# Altium PCB Flex_Bridge_SW.PcbDoc (part 2 of 2)
Units mm, origin at the board's own origin, x right, y up, seen from the top; angles counter-clockwise.
Board outline 84.91 x 39.78 mm, 2 copper layers (Top Layer, Bottom Layer); 3 components, 13 nets, 66 pads, 52 vias.
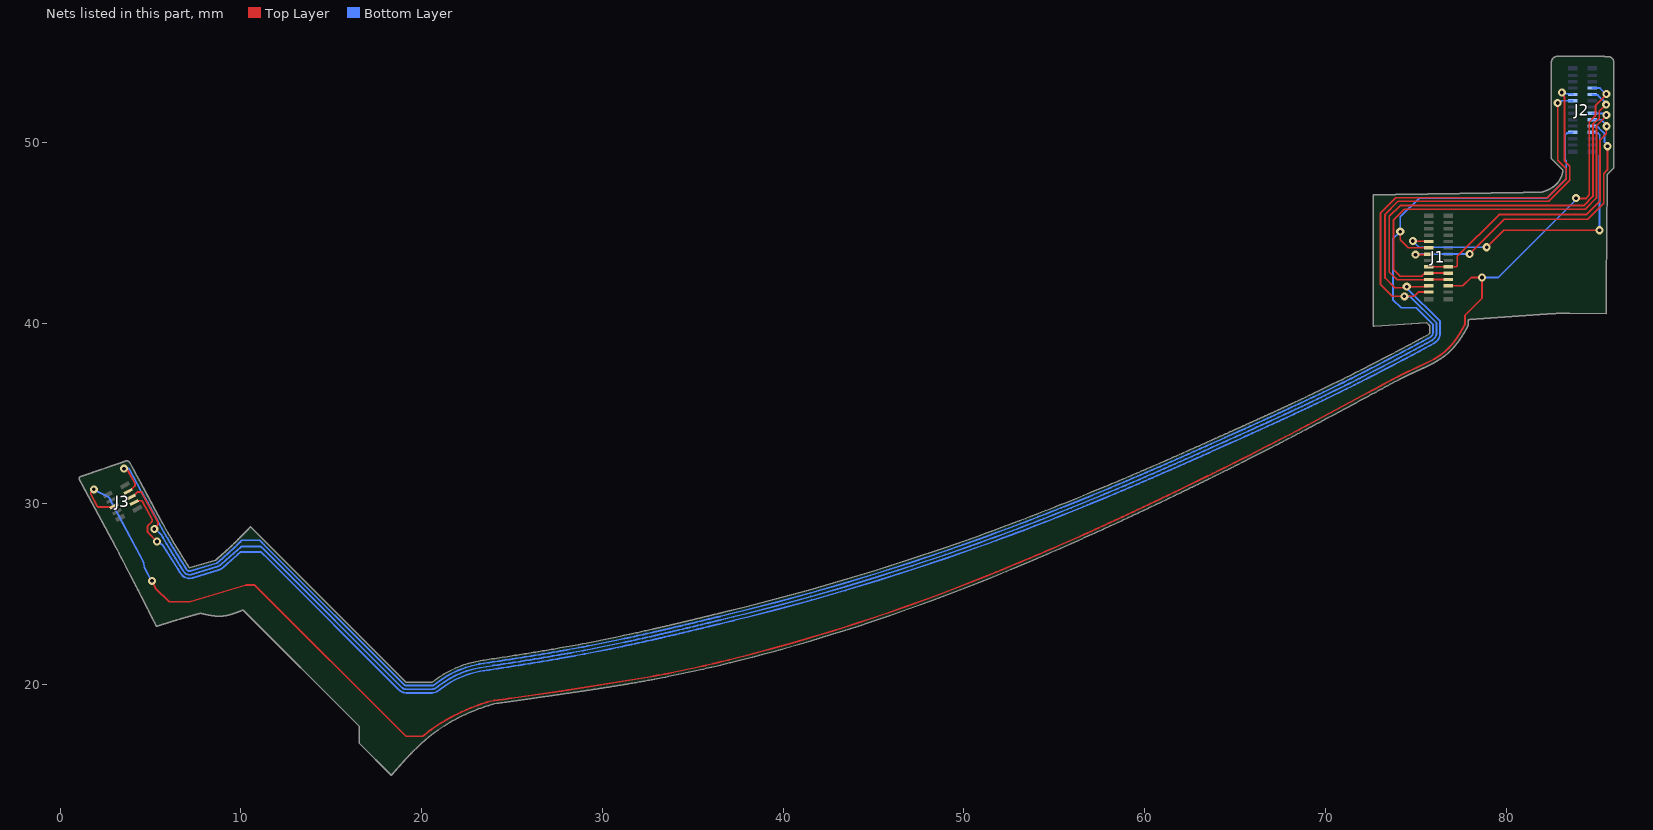
[diagram p2: the nets of this part, all layers, seen from the top]

## Via types
v1: diameter 0.45, hole 0.2, Top Layer to Bottom Layer, 52 vias

## Nets (pads, with @x,y where several pads share a name; then routed paths per layer and width w, separated by ;. In a path a pad name is that pad's centre, name@x,y a point inside that pad or via, vN(x,y) a via of type N, cw(c..) or ccw(c..) an arc to the next point about the centre after c; other vN are vias at no path point) (continued)
I2C3_SCL_3V3: J1.2 J2.10 J3.6 | length 109.2
  Top Layer w0.1: J3.6@3.931,30.378 4.004,30.378 4.283,30.658 4.496,30.658 5.41,29.008 5.41,28.839 5.213,28.643 v1(5.213,28.605) ; J1.2@75.711,41.712 75.137,41.712 74.903,41.478 73.696,41.478 73.05,42.124 73.05,46.101 73.886,46.937 82.279,46.937 83.319,47.977 83.319,48.531 83.29,48.56 82.849,49.001 v1(82.849,52.172)
  Bottom Layer w0.1: v1(5.213,28.605) 5.276,28.605 5.59,28.291 5.606,28.27 5.643,28.205 ccw(c5.817,28.305) 5.644,28.204 5.692,28.122 ccw(c5.865,28.222) 5.692,28.121 5.727,28.061 ; 5.728,28.06 5.76,28.004 5.79,27.954 5.817,27.909 5.84,27.869 5.864,27.828 5.885,27.793 ; 5.885,27.793 5.906,27.759 5.927,27.724 ; 5.927,27.723 5.948,27.688 5.987,27.622 6.005,27.592 6.042,27.532 6.079,27.471 ; 6.079,27.47 6.097,27.44 6.116,27.409 ; 6.116,27.409 6.132,27.384 6.147,27.359 6.162,27.333 6.178,27.308 6.193,27.283 ; 6.193,27.282 6.209,27.257 6.255,27.182 6.272,27.153 6.288,27.127 6.305,27.101 6.337,27.048 6.354,27.021 6.37,26.994 6.387,26.967 6.404,26.94 ; 6.404,26.94 6.421,26.913 6.438,26.885 6.472,26.83 6.49,26.802 6.525,26.746 6.551,26.703 6.565,26.682 ; 6.565,26.682 6.592,26.639 6.606,26.617 6.633,26.573 6.661,26.529 6.678,26.503 6.689,26.485 6.702,26.463 ; 6.703,26.463 6.717,26.44 6.745,26.395 6.774,26.35 6.803,26.304 6.837,26.25 ccw(c7.154,26.451) 7.262,26.092 8.71,26.525 ccw(c8.603,26.884) 8.849,26.602 8.865,26.616 ; 8.866,26.616 8.939,26.68 9,26.734 ; 9.001,26.734 9.069,26.794 ; 9.069,26.794 9.103,26.823 ; 9.103,26.824 9.149,26.864 ; 9.15,26.865 9.153,26.868 ; 9.154,26.868 9.198,26.908 ; 9.199,26.908 9.234,26.939 9.256,26.959 ccw(c9.007,27.239) 9.257,26.96 9.29,26.989 9.34,27.033 ; 9.34,27.034 9.36,27.051 9.404,27.09 9.987,27.61 cw(c10.053,27.535) 10.053,27.635 11.061,27.635 cw(c11.061,27.535) 11.132,27.606 11.207,27.531 11.592,27.146 18.886,19.852 ccw(c19.152,20.117) 19.152,19.742 20.572,19.742 ccw(c20.574,20.117) 20.807,19.823 20.9,19.897 cw(c24.218,15.603) 23.192,20.931 cw(c23.228,20.734) 23.198,20.932 23.22,20.936 23.576,20.991 23.938,21.047 cw(c23.969,20.849) 23.94,21.047 24.084,21.068 24.227,21.09 ; 24.227,21.09 24.369,21.111 24.51,21.133 ; 24.51,21.133 24.649,21.154 24.788,21.176 ; 24.789,21.176 24.925,21.197 ; 24.926,21.197 25.062,21.218 25.197,21.239 ccw(c25.166,21.437) 25.199,21.24 25.342,21.262 25.465,21.282 25.598,21.303 25.729,21.324 25.86,21.345 ; 25.861,21.345 25.989,21.366 26.118,21.387 ; 26.118,21.387 26.246,21.408 26.373,21.429 26.499,21.45 ; 26.5,21.45 26.624,21.471 ccw(c26.591,21.668) 26.625,21.471 26.748,21.492 26.871,21.513 26.994,21.534 27.115,21.555 27.236,21.575 ; 27.237,21.576 27.357,21.596 27.476,21.617 ; 27.477,21.617 27.595,21.638 ; 27.596,21.638 27.713,21.659 27.888,21.69 ; 27.889,21.69 28.062,21.721 28.234,21.752 ; 28.235,21.753 28.405,21.784 ; 28.406,21.784 28.574,21.815 ; 28.575,21.815 28.742,21.846 28.964,21.888 ; 28.964,21.888 29.183,21.929 29.454,21.982 ccw(c29.383,22.35) 29.456,21.982 30.403,22.17 ccw(c30.33,22.538) 30.406,22.171 30.815,22.255 ccw(c30.775,22.451) 30.816,22.255 31.07,22.308 ; 31.07,22.309 31.273,22.351 31.422,22.383 ; 31.423,22.383 31.573,22.416 ccw(c31.53,22.611) 31.574,22.416 31.722,22.448 31.822,22.47 ; 31.822,22.47 31.921,22.491 ; 31.921,22.491 32.02,22.513 ; 32.021,22.513 32.119,22.535 ; 32.119,22.535 32.217,22.557 32.316,22.578 ; 32.316,22.579 32.414,22.6 32.512,22.622 ; 32.513,22.623 32.611,22.644 32.709,22.667 32.809,22.689 32.904,22.711 32.953,22.722 ; 32.954,22.722 33.002,22.733 33.051,22.744 ; 33.052,22.745 33.1,22.756 33.148,22.767 33.247,22.789 ; 33.247,22.789 33.295,22.801 33.344,22.812 33.393,22.823 33.491,22.846 33.588,22.868 ; 33.589,22.869 33.637,22.88 ; 33.637,22.88 33.686,22.891 ; 33.686,22.891 33.735,22.903 33.784,22.914 ; 33.784,22.914 33.833,22.926 33.881,22.937 ccw(c33.836,23.132) 33.883,22.937 33.98,22.96 34.078,22.983 34.225,23.018 34.274,23.03 ; 34.274,23.03 34.421,23.064 ; 34.422,23.065 34.471,23.076 34.52,23.088 ; 34.521,23.088 34.669,23.123 34.718,23.135 34.767,23.147 34.816,23.159 34.966,23.195 35.066,23.219 35.166,23.243 35.215,23.255 35.266,23.267 ; 35.267,23.267 35.417,23.303 35.517,23.328 ; 35.518,23.328 35.572,23.341 35.822,23.401 ; 35.822,23.402 35.873,23.414 35.924,23.426 ; 35.925,23.426 35.975,23.439 36.078,23.464 36.285,23.514 36.336,23.527 ; 36.337,23.527 36.389,23.539 ; 36.389,23.539 36.441,23.552 36.545,23.578 36.598,23.59 ; 36.599,23.591 36.703,23.616 37.237,23.746 ; 37.238,23.747 37.939,23.92 ccw(c37.892,24.114) 37.943,23.921 39.617,24.35 ccw(c5.07,155.292) 50.836,27.838 51.313,28.01 ccw(c51.245,28.198) 51.314,28.01 51.737,28.165 ; 51.739,28.165 52.161,28.321 ccw(c52.091,28.509) 52.162,28.321 52.53,28.458 ; 52.531,28.459 52.898,28.597 ccw(c52.767,28.948) 52.9,28.597 53.214,28.716 53.528,28.836 ; 53.529,28.836 53.843,28.957 54.156,29.078 ; 54.157,29.078 54.417,29.179 ; 54.418,29.18 54.678,29.281 ; 54.678,29.282 54.938,29.384 ; 54.939,29.384 55.198,29.487 ; 55.199,29.487 55.458,29.59 ccw(c55.384,29.776) 55.459,29.59 55.718,29.693 ; 55.718,29.694 55.925,29.777 56.133,29.86 ; 56.134,29.861 56.34,29.944 ; 56.341,29.945 56.547,30.028 ; 56.548,30.029 56.754,30.113 56.961,30.197 ; 56.962,30.198 57.168,30.283 ; 57.169,30.283 57.375,30.368 ; 57.376,30.368 57.581,30.453 ; 57.583,30.454 57.789,30.539 57.996,30.625 58.151,30.69 58.306,30.755 ; 58.307,30.756 58.46,30.82 58.616,30.886 ; 58.617,30.886 58.771,30.951 58.926,31.017 ; 58.926,31.017 59.081,31.083 ; 59.082,31.083 59.236,31.149 59.391,31.214 ; 59.391,31.215 59.546,31.281 59.701,31.347 59.856,31.414 ; 59.857,31.414 60.011,31.481 60.167,31.548 ; 60.167,31.548 60.322,31.615 60.477,31.682 ; 60.478,31.682 60.633,31.75 ; 60.633,31.75 60.787,31.817 ; 60.788,31.817 60.943,31.885 61.098,31.953 ; 61.099,31.953 61.255,32.021 ; 61.255,32.021 61.41,32.089 61.566,32.158 61.669,32.203 61.774,32.249 61.878,32.295 61.982,32.341 ; 61.982,32.341 62.086,32.387 62.189,32.433 ; 62.19,32.433 62.294,32.479 ; 62.294,32.48 62.398,32.526 ; 62.399,32.526 62.502,32.572 ; 62.503,32.572 62.607,32.618 62.71,32.665 ; 62.711,32.665 62.815,32.711 62.92,32.758 63.024,32.805 ; 63.024,32.805 63.129,32.851 ; 63.129,32.852 63.233,32.898 63.337,32.945 ccw(c63.184,33.287) 63.339,32.946 63.442,32.992 ; 63.443,32.992 63.547,33.039 ; 63.548,33.039 63.651,33.086 ccw(c63.57,33.269) 63.653,33.087 64.171,33.32 ; 64.172,33.321 64.324,33.389 64.576,33.503 ; 64.577,33.503 64.676,33.548 65.023,33.704 ; 65.023,33.704 65.12,33.748 65.218,33.792 65.266,33.814 65.46,33.901 65.652,33.988 65.747,34.031 65.842,34.074 ; 65.843,34.074 65.89,34.096 65.937,34.117 ; 65.938,34.117 65.984,34.138 ; 65.985,34.138 66.219,34.245 66.313,34.287 ; 66.314,34.288 66.416,34.334 66.592,34.414 66.685,34.457 66.731,34.478 ccw(c66.648,34.66) 66.732,34.478 66.782,34.501 66.959,34.582 67.007,34.604 ; 67.007,34.604 67.053,34.625 ; 67.054,34.625 67.168,34.677 67.236,34.709 67.282,34.73 67.373,34.772 ; 67.374,34.772 67.465,34.814 67.601,34.877 67.738,34.94 67.783,34.961 67.925,35.026 68.056,35.087 68.101,35.109 ; 68.102,35.109 68.147,35.13 68.192,35.151 ; 68.193,35.151 68.237,35.172 ; 68.238,35.172 68.328,35.214 68.419,35.257 ccw(c68.334,35.438) 68.42,35.258 68.51,35.3 68.6,35.342 ; 68.601,35.342 68.692,35.385 ; 68.693,35.386 68.783,35.428 ccw(c68.698,35.609) 68.784,35.429 68.875,35.471 68.966,35.514 69.057,35.558 69.148,35.601 ccw(c68.987,35.94) 69.149,35.601 69.285,35.666 ; 69.286,35.667 69.423,35.732 ccw(c69.262,36.071) 69.424,35.732 69.562,35.799 ; 69.563,35.799 69.747,35.888 ; 69.748,35.888 69.98,36 ; 69.981,36.001 70.592,36.298 ccw(c70.429,36.636) 70.595,36.3 71.075,36.537 ; 71.076,36.537 71.32,36.659 ; 71.321,36.659 71.518,36.757 ccw(c71.351,37.093) 71.519,36.758 71.717,36.858 ; 71.718,36.858 71.869,36.934 72.021,37.011 72.175,37.089 ; 72.175,37.089 72.333,37.169 72.433,37.221 72.538,37.274 ; 72.539,37.274 72.642,37.328 72.748,37.382 ; 72.749,37.382 72.854,37.437 ccw(c72.683,37.77) 72.856,37.437 72.962,37.492 ; 72.962,37.492 73.069,37.548 73.178,37.604 73.287,37.66 ; 73.287,37.661 73.396,37.717 ; 73.397,37.717 73.507,37.775 ; 73.507,37.775 73.618,37.833 73.73,37.891 ; 73.73,37.891 73.842,37.95 ; 73.842,37.95 73.956,38.009 74.069,38.069 ; 74.07,38.07 74.185,38.13 ; 74.185,38.13 74.3,38.191 ; 74.301,38.192 74.417,38.253 74.534,38.315 ; v1(74.371,41.478) 74.386,41.464 74.687,41.464 76.145,40.006 76.145,39.431 cw(c75.77,39.431) 76.034,39.166 75.972,39.103 cw(c75.706,39.367) 75.884,39.037 75.757,38.969 ; 74.535,38.315 74.652,38.378 ; 74.653,38.378 74.771,38.441 ; 74.772,38.441 74.891,38.505 75.012,38.569 ; 75.013,38.569 75.134,38.634 ; 75.134,38.634 75.256,38.7 75.38,38.766 ; 75.38,38.766 75.505,38.833 75.629,38.9 75.756,38.968 ; v1(82.849,52.172) 82.944,52.172 83.074,52.302 83.6,52.302 83.64,52.262 J2.10@83.68,52.302
I2C3_SDA_1V8: J1.3 J2.5 J3.5 | length 110
  Top Layer w0.1: v1(1.868,30.798) 1.689,30.62 1.689,30.553 2.061,29.866 2.1,29.826 2.659,29.826 2.862,29.855 J3.5@2.978,29.871 ; v1(5.08,25.739) 5.273,25.34 6.029,24.584 7.186,24.584 10.239,25.497 10.268,25.502 10.77,25.502 19.133,17.138 20.059,17.138 20.113,17.182 20.175,17.233 20.237,17.283 20.311,17.341 20.396,17.406 20.505,17.488 cw(c26.017,10.016) 20.672,17.608 cw(c25.979,10.069) 21.332,18.032 21.473,18.113 21.592,18.178 21.699,18.235 21.794,18.285 21.891,18.333 21.975,18.375 22.06,18.416 22.147,18.456 22.219,18.49 22.293,18.523 22.368,18.556 22.443,18.588 22.481,18.604 ; 22.519,18.62 22.481,18.604 ; 23.968,19.106 23.795,19.082 23.787,19.08 23.634,19.032 23.564,19.01 23.495,18.987 23.426,18.965 23.358,18.942 23.291,18.919 23.224,18.895 23.158,18.872 23.092,18.848 23.027,18.824 22.962,18.8 22.898,18.775 22.835,18.75 22.772,18.725 22.71,18.7 22.633,18.669 22.556,18.636 22.481,18.604 ; 23.999,19.111 24.494,19.181 24.675,19.207 ; 24.676,19.207 24.743,19.216 ; 24.743,19.216 24.81,19.226 25.142,19.273 27.747,19.646 27.756,19.647 ccw(c27.689,20.092) 27.758,19.647 28.103,19.702 32.33,20.373 ccw(c32.228,21.015) 32.345,20.376 32.669,20.435 32.854,20.469 32.993,20.495 33.132,20.521 33.271,20.548 33.456,20.584 33.64,20.62 33.919,20.676 35.135,20.932 ; 35.136,20.933 35.372,20.985 35.564,21.028 35.708,21.061 35.853,21.094 35.999,21.128 36.146,21.162 36.294,21.197 36.393,21.221 36.492,21.244 36.591,21.268 36.692,21.292 36.792,21.317 36.893,21.342 36.995,21.366 37.046,21.379 37.454,21.481 37.914,21.597 38.373,21.716 ; 38.374,21.717 38.833,21.838 39.293,21.962 39.803,22.103 40.313,22.246 40.873,22.407 ; 40.875,22.407 41.169,22.494 41.434,22.571 42.045,22.755 42.655,22.941 43.316,23.149 44.024,23.376 ; 44.025,23.376 44.833,23.642 ccw(c44.771,23.832) 44.835,23.643 45.564,23.89 45.74,23.95 ccw(c45.676,24.139) 45.742,23.95 46.793,24.317 ; 46.793,24.317 46.798,24.319 48.14,24.806 ccw(c48.071,24.993) 48.142,24.806 ccw(c48.075,24.995) 48.147,24.808 48.805,25.057 49.678,25.387 ccw(c49.608,25.574) 49.681,25.388 51.1,25.946 51.779,26.22 52.264,26.418 52.697,26.596 53.082,26.757 53.418,26.898 53.674,27.006 53.707,27.02 53.994,27.143 ; 53.996,27.143 54.283,27.266 54.522,27.369 54.762,27.473 55.001,27.577 ; 55.002,27.577 55.241,27.681 55.481,27.787 55.673,27.871 55.865,27.956 56.057,28.041 56.249,28.127 56.441,28.213 56.634,28.299 56.826,28.385 56.973,28.452 57.018,28.472 57.163,28.538 57.239,28.572 57.307,28.603 57.452,28.669 57.597,28.735 57.742,28.802 ; 57.742,28.802 57.887,28.868 58.032,28.935 58.178,29.002 58.323,29.069 58.469,29.136 58.614,29.204 58.76,29.272 58.906,29.34 59.053,29.408 59.199,29.477 59.346,29.545 59.493,29.614 59.64,29.683 ; 59.64,29.684 59.788,29.754 59.934,29.822 60.082,29.892 60.23,29.963 ; 60.231,29.963 60.329,30.01 60.428,30.057 60.527,30.104 ; 60.528,30.104 60.626,30.151 60.725,30.198 60.824,30.246 60.923,30.293 ; 60.924,30.294 61.023,30.341 61.123,30.389 61.222,30.437 61.322,30.485 61.422,30.533 61.522,30.581 ccw(c61.437,30.762) 61.524,30.582 61.622,30.629 61.73,30.681 61.823,30.727 61.901,30.764 62.04,30.832 62.14,30.88 63.491,31.539 63.582,31.584 63.672,31.628 63.761,31.672 63.854,31.718 63.985,31.782 64.122,31.851 64.22,31.899 64.809,32.192 64.939,32.257 65.067,32.321 65.195,32.385 65.322,32.449 65.491,32.534 65.701,32.64 ; 65.702,32.64 66.751,33.175 66.92,33.262 67.047,33.327 67.174,33.393 67.301,33.459 67.429,33.525 67.515,33.57 67.616,33.622 67.686,33.659 67.774,33.705 68.006,33.826 68.429,34.047 68.562,34.117 68.651,34.164 68.741,34.212 68.833,34.26 68.924,34.308 69.015,34.356 69.109,34.406 69.199,34.454 69.363,34.54 69.513,34.62 72.447,36.194 ; 73.832,36.944 73.752,36.901 ccw(c73.835,36.747) 73.751,36.9 73.67,36.856 73.528,36.779 73.245,36.626 72.991,36.488 72.798,36.384 72.683,36.322 72.58,36.266 72.448,36.194 ; 73.833,36.944 73.893,36.976 73.942,37.002 ; 73.943,37.002 73.984,37.024 74.02,37.042 74.055,37.06 ; 74.056,37.06 74.085,37.075 74.114,37.09 74.144,37.105 74.167,37.116 ; 74.167,37.116 74.19,37.128 ; 74.19,37.128 74.236,37.151 74.276,37.17 74.293,37.179 74.326,37.195 74.343,37.203 ; 74.344,37.204 74.36,37.212 74.393,37.228 ; 74.394,37.228 74.41,37.236 ; 74.411,37.236 74.436,37.248 cw(c74.513,37.091) 74.438,37.249 74.449,37.254 74.47,37.265 ; 74.471,37.265 74.493,37.276 74.525,37.291 74.568,37.311 cw(c74.642,37.153) 74.569,37.312 74.589,37.321 74.621,37.336 74.641,37.346 74.668,37.358 74.726,37.385 75.07,37.546 75.889,37.939 ccw(c75.803,38.119) 75.899,37.943 75.992,37.995 ccw(c75.896,38.171) 75.994,37.996 ccw(c75.896,38.171) 75.996,37.998 76.018,38.01 76.019,38.011 76.04,38.022 76.051,38.029 ccw(c75.9,38.288) 76.053,38.03 ccw(c75.9,38.288) 76.054,38.031 ; 76.054,38.031 76.074,38.043 76.076,38.044 76.085,38.049 76.094,38.055 ccw(c75.994,38.228) 76.097,38.056 76.104,38.06 76.108,38.063 76.13,38.076 ; 76.131,38.077 76.133,38.078 76.141,38.083 76.151,38.089 ccw(c75.995,38.345) 76.153,38.09 76.155,38.092 76.163,38.097 76.18,38.107 76.185,38.11 76.198,38.118 76.2,38.119 ccw(c76.092,38.288) 76.201,38.121 76.212,38.128 76.229,38.138 76.245,38.149 76.26,38.158 76.271,38.166 76.284,38.174 76.286,38.176 ; 76.287,38.176 76.3,38.185 ; 76.301,38.186 76.316,38.196 76.318,38.198 ; 76.32,38.199 76.336,38.21 76.353,38.222 ; 76.354,38.223 76.375,38.238 76.379,38.241 76.382,38.243 76.394,38.251 ccw(c76.278,38.414) 76.397,38.253 76.408,38.262 76.416,38.268 76.427,38.275 76.441,38.286 76.46,38.301 76.468,38.306 ; 76.469,38.307 76.493,38.326 76.501,38.332 ccw(c76.317,38.569) 76.503,38.333 76.532,38.357 76.547,38.369 ; 76.548,38.369 ccw(c74.375,41.049) 76.771,38.566 76.802,38.597 ccw(c76.662,38.74) 76.804,38.599 76.832,38.627 ; J1.3@76.791,42.062 77.606,42.062 78.063,42.52 v1(78.664,42.52) 78.664,41.377 77.723,40.435 77.723,39.938 ; 76.828,38.624 76.852,38.65 76.873,38.672 76.893,38.694 76.913,38.717 76.93,38.736 76.947,38.755 76.964,38.775 76.981,38.794 76.997,38.814 77.011,38.83 77.024,38.847 77.038,38.863 77.051,38.88 77.065,38.896 77.078,38.913 77.091,38.93 77.105,38.948 77.118,38.965 77.131,38.982 77.145,39 77.158,39.018 77.171,39.036 77.185,39.054 77.198,39.072 77.208,39.086 77.218,39.1 77.228,39.114 77.238,39.128 77.248,39.143 77.258,39.157 77.268,39.171 77.278,39.186 77.288,39.201 77.298,39.215 77.308,39.23 77.318,39.245 77.328,39.26 77.338,39.275 77.348,39.29 77.358,39.306 77.367,39.321 77.377,39.337 77.387,39.352 77.397,39.368 77.407,39.384 77.417,39.4 77.427,39.416 77.437,39.432 77.447,39.448 77.457,39.465 77.467,39.481 77.477,39.498 77.487,39.515 77.497,39.531 77.507,39.548 77.517,39.565 77.527,39.583 77.537,39.6 77.547,39.617 77.557,39.635 77.567,39.652 77.577,39.67 77.587,39.688 77.597,39.706 77.608,39.724 77.618,39.742 77.628,39.76 77.638,39.779 77.648,39.797 77.658,39.816 77.668,39.835 77.678,39.854 77.688,39.873 77.698,39.892 77.708,39.911 77.718,39.931 77.722,39.937 ; 76.832,38.627 ccw(c76.69,38.768) 76.845,38.641 ; v1(83.863,46.912) 83.887,46.888 84.4,46.888 84.599,47.088 84.599,51.124 84.938,51.462 84.938,52.028 85.16,52.251 85.542,52.632 v1(85.542,52.674) ; 72.447,36.194 ccw(c72.352,36.37) 72.448,36.194
  Bottom Layer w0.1: v1(1.868,30.798) 1.868,30.784 1.892,30.76 2.667,30.372 2.681,30.365 2.703,30.343 4.62,26.754 4.622,26.734 4.648,26.492 5.039,25.759 5.055,25.73 5.064,25.739 v1(5.08,25.739) ; v1(78.664,42.52) 79.565,42.52 83.863,46.818 v1(83.863,46.912) ; J2.5@84.76,53.002 85.192,53.002 85.519,52.674 v1(85.542,52.674)
I2C3_SDA_3V3: J1.4 J2.8 J3.8 | length 109
  Top Layer w0.1: J3.8@4.096,30.069 4.287,30.168 4.51,30.168 4.55,30.128 4.571,30.09 5.1,29.127 5.1,29.034 5.054,28.988 4.851,28.785 4.851,28.774 4.838,28.761 4.838,28.424 5.348,27.915 v1(5.359,27.915) ; J1.4@75.711,42.062 75.671,42.022 75.446,42.022 75.437,42.014 v1(74.497,42.014) 74.435,41.951 73.847,41.951 73.304,42.494 73.304,46.025 74.017,46.737 82.168,46.737 82.169,46.736 82.361,46.736 83.519,47.894 83.519,48.686 83.224,48.98 83.224,52.522 83.083,52.663 v1(83.083,52.756)
  Bottom Layer w0.1: v1(5.359,27.915) 5.647,27.744 5.684,27.707 6.478,26.445 6.492,26.422 6.519,26.378 ; 6.52,26.378 6.533,26.357 ; 6.534,26.356 6.548,26.334 6.576,26.288 ; 6.577,26.288 6.605,26.243 ; 6.605,26.243 6.634,26.197 ; 6.634,26.197 6.669,26.143 ccw(c7.154,26.451) 7.318,25.9 ; 7.319,25.9 8.768,26.334 ccw(c8.603,26.884) 8.981,26.451 8.996,26.465 ccw(c8.619,26.899) 8.998,26.466 9.071,26.53 ; 9.071,26.53 9.089,26.545 9.132,26.583 ; 9.133,26.584 9.201,26.643 ccw(c9.069,26.794) 9.202,26.644 9.218,26.658 9.234,26.673 ccw(c8.855,27.105) 9.235,26.674 9.81,27.179 cw(c9.894,27.126) 9.828,27.2 9.946,27.305 cw(c10.012,27.23) 10.012,27.33 11.1,27.33 cw(c11.082,27.232) 11.152,27.303 11.509,26.946 18.744,19.711 ccw(c19.152,20.117) 19.096,19.545 ccw(c19.152,20.117) 19.152,19.542 20.572,19.542 ccw(c20.574,20.117) 20.931,19.666 21.024,19.74 cw(c24.218,15.603) 23.223,20.733 cw(c24.218,15.603) 23.225,20.734 cw(c24.218,15.603) 23.228,20.734 23.735,20.812 23.969,20.849 ; 23.969,20.849 24.114,20.871 ; 24.115,20.871 24.257,20.892 24.399,20.914 ; 24.399,20.914 24.54,20.935 24.679,20.957 24.818,20.978 ccw(c24.757,21.373) 24.819,20.978 24.955,20.999 25.093,21.021 25.228,21.042 25.364,21.063 25.497,21.084 25.629,21.105 25.761,21.127 ; 25.761,21.127 25.892,21.148 ; 25.893,21.148 26.021,21.169 26.15,21.19 26.278,21.211 ; 26.279,21.211 26.405,21.232 26.531,21.253 ; 26.533,21.253 26.657,21.274 ; 26.658,21.274 26.781,21.295 26.905,21.316 ; 26.906,21.316 27.027,21.337 ; 27.028,21.337 27.149,21.357 27.27,21.378 27.39,21.399 ; 27.392,21.399 27.511,21.42 ; 27.512,21.42 27.63,21.441 27.748,21.462 ; 27.748,21.462 27.923,21.493 28.097,21.524 ; 28.098,21.525 28.269,21.556 ccw(c28.199,21.949) 28.271,21.556 28.441,21.587 ; 28.442,21.587 28.611,21.618 ; 28.612,21.618 28.779,21.649 ; 28.78,21.65 29.001,21.691 ccw(c28.964,21.888) 29.002,21.691 29.22,21.733 ; 29.222,21.733 29.492,21.785 ccw(c29.417,22.178) 29.495,21.786 30.442,21.974 ccw(c30.33,22.538) 30.446,21.975 30.855,22.059 ccw(c30.815,22.255) 30.858,22.06 31.111,22.113 ccw(c31.07,22.308) 31.112,22.113 31.314,22.156 31.464,22.188 ; 31.465,22.188 31.614,22.22 ; 31.615,22.22 31.765,22.252 ccw(c31.722,22.448) 31.766,22.253 31.865,22.274 31.964,22.296 32.063,22.318 ccw(c32.02,22.513) 32.064,22.318 32.162,22.339 ; 32.163,22.34 32.261,22.361 32.359,22.383 32.458,22.405 ; 32.458,22.405 32.556,22.427 ccw(c32.512,22.622) 32.557,22.427 32.654,22.449 ; 32.655,22.449 32.753,22.471 32.856,22.495 32.949,22.516 32.998,22.527 ; 32.999,22.527 33.047,22.538 ; 33.047,22.538 33.096,22.549 ; 33.096,22.55 33.144,22.561 ; 33.145,22.561 33.194,22.572 33.242,22.583 33.34,22.606 ccw(c33.295,22.801) 33.341,22.606 33.438,22.628 33.536,22.651 33.634,22.674 ; 33.634,22.674 33.683,22.685 33.78,22.708 33.878,22.731 ; 33.879,22.731 33.927,22.742 ccw(c33.881,22.937) 33.928,22.742 34.025,22.765 34.075,22.777 34.124,22.788 34.272,22.823 34.419,22.858 34.467,22.87 34.517,22.882 34.567,22.893 ; 34.567,22.894 34.765,22.941 34.814,22.952 ; 34.814,22.953 34.863,22.964 ccw(c34.817,23.159) 34.865,22.965 35.014,23 35.213,23.048 35.262,23.06 ; 35.263,23.06 35.313,23.073 ; 35.314,23.073 35.463,23.109 35.564,23.133 35.615,23.146 ; 35.616,23.146 35.869,23.207 ; 35.87,23.207 35.921,23.22 ; 35.921,23.22 35.971,23.232 ; 35.972,23.232 36.022,23.244 ; 36.023,23.245 36.125,23.269 ; 36.126,23.27 36.332,23.32 ; 36.333,23.32 36.384,23.332 36.488,23.358 ; 36.489,23.358 36.645,23.396 36.751,23.422 37.284,23.552 ccw(c37.189,23.941) 37.286,23.552 37.989,23.726 ccw(c37.892,24.114) 37.991,23.726 39.667,24.157 ccw(c5.07,155.292) 50.905,27.65 51.381,27.822 ccw(c51.313,28.01) 51.383,27.822 51.806,27.977 ccw(c51.737,28.165) 51.808,27.977 ; 51.808,27.978 52.23,28.133 ccw(c52.161,28.321) 52.232,28.134 52.6,28.271 ccw(c52.53,28.458) 52.601,28.272 52.969,28.41 53.283,28.529 ; 53.283,28.529 ccw(c53.214,28.716) 53.286,28.53 53.6,28.649 ; 53.601,28.65 53.914,28.77 ccw(c53.843,28.957) 53.916,28.771 54.23,28.892 54.489,28.993 ccw(c54.345,29.366) 54.491,28.993 54.75,29.095 ccw(c54.605,29.468) 54.752,29.096 55.011,29.198 ccw(c54.938,29.384) 55.013,29.198 55.271,29.3 ccw(c55.199,29.487) 55.273,29.301 55.532,29.404 ccw(c55.458,29.59) 55.534,29.405 55.792,29.508 ; 55.793,29.508 55.999,29.591 ccw(c55.851,29.962) 56.001,29.592 56.208,29.675 ; 56.209,29.675 56.415,29.759 ccw(c56.34,29.944) 56.416,29.759 56.623,29.843 ; 56.624,29.843 56.83,29.927 ; 56.831,29.928 57.037,30.012 ; 57.038,30.013 57.244,30.098 ; 57.245,30.098 57.451,30.183 ccw(c57.375,30.368) 57.452,30.183 57.658,30.268 ccw(c57.439,30.8) 57.661,30.27 57.866,30.355 58.072,30.441 ; 58.073,30.441 58.228,30.506 ; 58.229,30.506 58.383,30.571 ; 58.384,30.571 58.537,30.636 ccw(c58.315,31.166) 58.539,30.636 58.693,30.701 ; 58.694,30.702 58.848,30.767 ; 58.849,30.767 59.003,30.832 ccw(c58.848,31.201) 59.005,30.833 59.159,30.898 ccw(c59.003,31.267) 59.161,30.899 59.314,30.965 59.469,31.031 ; 59.47,31.031 59.624,31.097 ; 59.625,31.097 59.78,31.164 ; 59.781,31.164 59.935,31.23 60.09,31.297 ccw(c59.933,31.665) 60.091,31.297 60.246,31.364 60.401,31.431 60.556,31.498 ; 60.557,31.499 60.712,31.566 60.867,31.633 ccw(c60.708,32.001) 60.868,31.634 61.023,31.701 61.178,31.769 ; 61.179,31.77 61.335,31.838 ; 61.336,31.838 61.49,31.906 ccw(c61.33,32.272) 61.492,31.907 61.646,31.975 61.75,32.02 ; 61.751,32.021 61.855,32.066 61.959,32.112 ; 61.959,32.112 62.063,32.158 ; 62.063,32.158 62.167,32.204 ; 62.168,32.205 62.27,32.25 62.375,32.297 ; 62.376,32.297 62.479,32.343 ; 62.481,32.343 62.583,32.389 ; 62.584,32.389 62.688,32.436 62.792,32.482 ; 62.793,32.482 62.897,32.529 63.001,32.575 ; 63.002,32.575 63.105,32.622 ; 63.106,32.622 63.21,32.669 ; 63.211,32.669 63.314,32.715 ccw(c63.152,33.081) 63.316,32.716 63.419,32.762 ccw(c63.184,33.287) 63.421,32.763 63.524,32.81 ; 63.525,32.81 63.628,32.856 ccw(c63.394,33.381) 63.63,32.857 63.733,32.904 ; 63.733,32.904 ccw(c63.57,33.269) 63.734,32.904 64.758,33.365 ; 64.759,33.366 65.105,33.521 ; 65.105,33.522 65.349,33.631 ; 65.349,33.632 65.543,33.719 ; 65.544,33.719 65.735,33.806 65.83,33.849 ; 65.83,33.849 65.924,33.891 ; 65.925,33.892 65.973,33.913 ; 65.973,33.914 66.02,33.935 ; 66.02,33.935 66.067,33.956 ccw(c65.985,34.138) 66.069,33.957 66.302,34.063 ; 66.303,34.063 66.396,34.106 66.498,34.152 66.675,34.232 66.768,34.275 ; 66.769,34.275 66.814,34.296 ; 66.815,34.296 66.86,34.317 67.045,34.401 67.09,34.422 ; 67.091,34.422 67.137,34.443 ccw(c67.053,34.625) 67.138,34.444 ; 67.138,34.444 67.232,34.487 67.319,34.527 ; 67.32,34.527 67.365,34.548 67.457,34.59 67.548,34.632 ccw(c67.381,34.996) 67.551,34.633 67.684,34.695 67.822,34.759 67.874,34.782 68.007,34.844 68.133,34.903 68.186,34.927 ; 68.186,34.928 68.231,34.948 ; 68.232,34.949 68.276,34.97 ; 68.277,34.97 68.321,34.99 ; 68.322,34.991 68.412,35.033 ; 68.414,35.034 68.504,35.076 ; 68.505,35.076 68.595,35.118 ; 68.595,35.119 68.685,35.161 ccw(c68.516,35.523) 68.687,35.162 68.777,35.204 ccw(c68.692,35.385) 68.778,35.205 68.868,35.247 ; 68.869,35.247 68.959,35.29 ; 68.96,35.29 69.051,35.333 69.143,35.377 69.233,35.42 ccw(c68.987,35.94) 69.236,35.421 69.371,35.486 ccw(c69.285,35.666) 69.372,35.486 69.509,35.551 ccw(c69.424,35.732) 69.511,35.552 69.648,35.618 ccw(c69.476,35.979) 69.65,35.619 69.834,35.707 ; 69.835,35.708 70.067,35.82 ccw(c69.893,36.18) 70.069,35.821 70.68,36.119 ccw(c70.429,36.636) 70.684,36.12 71.164,36.357 ; 71.165,36.358 71.409,36.48 ccw(c71.321,36.659) 71.411,36.481 71.607,36.578 ccw(c71.351,37.093) 71.609,36.579 71.807,36.679 ; 71.808,36.679 71.959,36.755 ccw(c71.779,37.113) 71.96,36.756 72.111,36.832 ; 72.112,36.833 72.265,36.91 ; 72.266,36.911 72.425,36.992 72.525,37.043 72.629,37.096 ; 72.63,37.096 72.733,37.149 ccw(c72.552,37.506) 72.735,37.15 72.839,37.204 ccw(c72.657,37.56) 72.84,37.204 72.946,37.259 ccw(c72.854,37.437) 72.947,37.26 73.053,37.314 ; 73.054,37.315 73.161,37.37 ; 73.162,37.37 73.27,37.426 ; 73.271,37.426 73.379,37.483 73.488,37.539 73.599,37.597 ; 73.6,37.598 73.71,37.655 73.822,37.714 73.935,37.773 ; 73.935,37.773 74.049,37.832 ccw(c73.956,38.009) 74.05,37.833 74.162,37.892 ccw(c73.977,38.247) 74.164,37.893 74.277,37.953 ccw(c74.091,38.307) 74.279,37.954 74.394,38.014 ccw(c74.3,38.191) 74.395,38.015 74.509,38.075 ccw(c74.242,38.584) 74.511,38.076 74.628,38.138 74.746,38.201 ; v1(74.497,42.014) 74.497,41.936 76.345,40.089 76.345,39.349 76.322,39.271 cw(c75.77,39.431) 76.175,39.024 76.113,38.962 cw(c75.706,39.367) 76.097,38.946 cw(c75.706,39.367) 75.979,38.861 75.852,38.793 cw(c75.579,39.299) 75.85,38.792 75.726,38.725 cw(c75.452,39.231) 75.724,38.724 75.6,38.657 ; 74.747,38.202 74.865,38.264 ; 74.866,38.265 74.986,38.328 ; 74.987,38.329 75.106,38.393 75.227,38.457 ccw(c75.04,38.811) 75.229,38.458 75.351,38.523 ; 75.351,38.524 75.475,38.59 75.599,38.657 ; v1(83.083,52.756) 83.148,52.692 83.64,52.692 J2.8@83.68,52.652
MCU_I/O_1: J1.5 J1.6 J2.7 | length 24.7
  Top Layer w0.1: J1.6@75.711,42.393 73.965,42.393 73.533,42.824 73.533,45.898 74.135,46.5 84.295,46.5 84.799,47.005 84.799,50.992 85.147,51.339 85.147,51.707 v1(85.529,52.089) ; J1.6@75.711,42.412 J1.5@76.791,42.412
  Bottom Layer w0.1: J2.7@84.76,52.652 84.8,52.612 85.074,52.612 85.529,52.157 v1(85.529,52.089)
MCU_I/O_2: J1.7 J1.8 J2.13 | length 23.4
  Top Layer w0.1: J1.7@76.791,42.762 75.536,42.762 75.496,42.722 75.454,42.722 75.324,42.593 74.146,42.593 73.762,42.977 73.762,45.695 74.367,46.3 84.378,46.3 84.999,46.922 84.999,50.909 85.547,51.457 v1(85.547,51.511)
  Bottom Layer w0.1: J2.13@84.76,51.602 85.362,51.602 85.452,51.511 v1(85.547,51.511)
MCU_I/O_3: J1.9 J1.10 J2.15 | length 16.6
  Top Layer w0.1: J1.10@75.711,43.112 J1.9@76.791,43.112 77.234,43.112 77.263,43.141 77.292,43.171 77.292,43.685 79.607,45.999 84.43,45.999 85.199,46.769 85.199,50.128 85.536,50.465 85.536,50.865 v1(85.561,50.89)
  Bottom Layer w0.1: J2.15@84.76,51.252 85.26,51.252 85.561,50.951 v1(85.561,50.89)
MCU_I/O_4: J1.16 J2.20 J3.4 | length 108.3
  Top Layer w0.1: v1@3.428,31.949 3.637,31.949 3.737,31.848 3.754,31.825 4.128,31.144 4.14,31.121 4.14,30.988 3.839,30.687 J3.4@3.767,30.687 ; v1(74.143,45.06) 74.143,44.602 74.58,44.165 75.037,44.165 75.039,44.162 J1.16@75.711,44.162
  Bottom Layer w0.1: v1@3.556,31.979 cw(c3.556,30.918) 3.795,31.951 3.816,31.931 3.826,31.92 4.497,30.672 4.499,30.667 5.413,29.017 5.424,28.997 5.438,28.971 5.452,28.946 5.467,28.921 5.484,28.89 5.501,28.86 5.521,28.824 5.541,28.788 5.567,28.742 ; 5.567,28.742 5.596,28.69 ; 5.597,28.689 5.817,28.305 ; 5.817,28.304 5.865,28.222 5.9,28.162 ; 5.9,28.161 5.933,28.106 ; 5.933,28.106 5.962,28.056 5.989,28.01 6.013,27.97 6.036,27.93 6.057,27.896 6.078,27.861 6.099,27.826 6.12,27.791 6.141,27.755 6.159,27.725 6.177,27.695 6.195,27.665 ; 6.195,27.664 6.231,27.605 6.25,27.574 6.269,27.543 6.287,27.512 6.302,27.488 6.318,27.463 ; 6.318,27.462 6.333,27.437 6.348,27.412 6.364,27.387 6.379,27.361 6.395,27.336 6.411,27.31 6.427,27.284 6.443,27.258 6.459,27.232 ; 6.459,27.232 6.475,27.206 6.491,27.179 6.507,27.153 6.524,27.126 6.541,27.099 6.557,27.072 6.574,27.045 6.591,27.018 6.608,26.991 6.625,26.963 6.642,26.936 6.66,26.908 6.677,26.88 6.695,26.852 6.721,26.809 6.734,26.788 6.761,26.745 6.775,26.723 6.789,26.702 6.802,26.68 6.83,26.636 6.858,26.592 6.878,26.56 6.886,26.547 6.895,26.533 6.906,26.515 6.914,26.502 6.915,26.501 6.922,26.489 6.933,26.472 6.943,26.457 6.948,26.449 6.958,26.434 6.971,26.412 6.976,26.405 6.982,26.396 6.998,26.371 7.006,26.357 ccw(c7.154,26.451) 7.204,26.283 8.653,26.717 ccw(c8.603,26.884) 8.718,26.753 8.734,26.767 ; 8.735,26.767 8.808,26.831 8.849,26.867 8.869,26.885 ; 8.869,26.885 8.874,26.889 ccw(c8.759,27.021) 8.875,26.89 8.913,26.923 8.938,26.945 8.971,26.974 9.017,27.015 9.022,27.019 ccw(c8.906,27.15) 9.023,27.02 9.066,27.057 ccw(c8.951,27.189) 9.067,27.058 9.102,27.089 9.123,27.108 9.145,27.127 9.207,27.182 9.227,27.201 9.259,27.229 9.283,27.25 9.294,27.261 9.335,27.297 9.352,27.312 9.357,27.317 9.385,27.342 ; 9.385,27.342 9.396,27.352 9.412,27.367 9.418,27.372 9.436,27.389 9.472,27.421 9.484,27.433 ccw(c9.367,27.563) 9.487,27.436 9.507,27.454 9.539,27.484 ; 9.54,27.484 9.548,27.492 9.567,27.509 9.587,27.529 9.599,27.54 ; 9.6,27.54 9.611,27.55 ; 9.611,27.551 9.646,27.583 9.658,27.595 ; 9.659,27.596 9.784,27.716 ; 9.785,27.716 9.808,27.739 ; 9.808,27.739 9.826,27.756 9.854,27.784 9.877,27.806 9.887,27.816 ; 9.887,27.816 9.897,27.826 9.907,27.836 9.932,27.861 9.94,27.869 9.948,27.877 9.955,27.884 9.962,27.891 ; 9.962,27.891 9.968,27.897 ; 9.969,27.898 9.982,27.911 10.003,27.932 10.023,27.952 10.052,27.981 11.04,27.981 11.185,27.836 11.272,27.749 ; 11.273,27.748 19.027,19.993 ccw(c19.152,20.117) 19.152,19.942 20.573,19.942 ccw(c20.574,20.117) 20.683,19.98 20.776,20.054 cw(c24.218,15.603) 23.156,21.128 cw(c23.228,20.734) 23.168,21.13 23.205,21.136 23.452,21.174 23.766,21.223 23.911,21.245 24.055,21.266 24.197,21.288 24.339,21.309 24.479,21.331 ; 24.48,21.331 24.619,21.352 24.757,21.373 24.895,21.395 25.031,21.416 ; 25.031,21.416 25.173,21.438 25.301,21.458 25.434,21.479 25.566,21.5 25.698,21.522 25.828,21.543 ccw(c25.8,21.715) 25.829,21.543 25.957,21.564 26.086,21.585 26.213,21.606 ; 26.214,21.606 26.34,21.626 26.466,21.647 26.591,21.668 26.715,21.689 26.838,21.71 26.96,21.731 27.082,21.752 ; 27.082,21.752 27.203,21.773 ; 27.203,21.773 27.323,21.793 27.442,21.814 27.56,21.835 27.678,21.856 27.853,21.887 28.027,21.918 28.199,21.949 28.369,21.98 28.538,22.012 28.706,22.043 ; 28.706,22.043 28.927,22.084 29.146,22.126 ; 29.146,22.126 29.416,22.178 ; 29.417,22.178 30.364,22.366 ; 30.365,22.367 30.775,22.451 ; 30.775,22.451 31.029,22.504 31.231,22.547 31.381,22.579 31.53,22.611 31.68,22.643 31.774,22.664 31.878,22.687 31.977,22.708 32.076,22.73 ; 32.076,22.73 32.174,22.752 32.272,22.774 32.371,22.796 32.469,22.817 32.567,22.84 32.664,22.862 32.762,22.884 32.811,22.895 32.86,22.906 32.909,22.917 32.958,22.928 33.006,22.939 33.055,22.951 33.104,22.962 33.153,22.973 33.202,22.984 33.25,22.995 33.299,23.007 33.348,23.018 33.397,23.029 33.445,23.041 33.494,23.052 33.543,23.063 33.592,23.075 33.641,23.086 33.689,23.097 33.738,23.109 33.787,23.12 33.836,23.132 33.885,23.143 33.934,23.155 33.983,23.166 34.032,23.178 34.13,23.201 34.179,23.213 34.228,23.224 34.277,23.236 34.326,23.247 34.375,23.259 34.425,23.271 ; 34.426,23.271 34.474,23.283 34.622,23.318 ; 34.622,23.318 34.721,23.342 34.771,23.353 34.87,23.377 35.019,23.413 35.119,23.437 35.169,23.449 35.219,23.461 35.269,23.473 35.37,23.498 35.471,23.522 35.521,23.534 35.572,23.547 ; 35.572,23.547 35.775,23.596 35.826,23.608 35.877,23.621 35.928,23.633 36.031,23.658 36.238,23.708 36.29,23.721 36.342,23.734 36.394,23.747 36.498,23.772 36.551,23.785 36.656,23.81 36.868,23.862 37.189,23.941 37.892,24.114 ccw(c37.85,24.284) 37.893,24.114 39.567,24.544 ; 39.568,24.544 ccw(c5.07,155.292) 50.768,28.025 51.245,28.198 ; 51.246,28.198 51.669,28.353 ; 51.669,28.353 52.091,28.509 52.46,28.646 ; 52.461,28.646 52.828,28.784 53.143,28.903 ; 53.143,28.903 53.457,29.023 ; 53.458,29.023 53.771,29.143 ; 53.771,29.144 54.084,29.264 54.345,29.366 54.605,29.468 54.865,29.57 55.125,29.673 ; 55.125,29.673 55.384,29.776 55.644,29.879 55.851,29.962 ; 55.851,29.963 56.058,30.046 56.265,30.13 56.472,30.214 56.679,30.298 56.886,30.383 57.092,30.468 57.299,30.553 ; 57.3,30.553 57.506,30.638 57.712,30.724 57.919,30.81 58.074,30.875 58.228,30.94 58.383,31.005 58.538,31.07 58.693,31.135 58.848,31.201 59.003,31.267 59.158,31.333 59.312,31.399 59.467,31.465 ; 59.468,31.465 59.622,31.531 59.777,31.598 59.932,31.664 60.087,31.731 60.243,31.798 60.398,31.866 60.553,31.933 ; 60.553,31.933 60.708,32.001 60.864,32.068 61.019,32.136 ; 61.019,32.136 61.174,32.204 61.33,32.272 61.486,32.341 61.589,32.387 61.693,32.432 61.797,32.478 61.901,32.524 ; 61.901,32.524 62.005,32.57 62.109,32.616 62.213,32.662 62.317,32.708 62.421,32.755 62.525,32.801 62.63,32.848 62.734,32.894 62.838,32.941 ; 62.838,32.941 62.943,32.987 63.047,33.034 63.152,33.081 63.256,33.128 63.361,33.175 63.465,33.222 63.57,33.269 63.675,33.316 64.008,33.466 64.444,33.663 64.494,33.685 64.594,33.73 64.941,33.886 65.039,33.93 65.136,33.974 65.185,33.996 65.378,34.084 65.57,34.17 65.665,34.213 65.76,34.256 65.808,34.278 65.855,34.299 65.902,34.321 66.137,34.427 66.231,34.47 66.333,34.516 66.51,34.596 66.602,34.639 66.648,34.66 66.694,34.681 66.786,34.723 66.832,34.744 66.878,34.765 66.924,34.786 66.97,34.807 67.016,34.828 67.062,34.849 67.153,34.891 67.199,34.912 67.29,34.954 ; 67.29,34.954 67.381,34.996 67.427,35.016 67.518,35.058 67.608,35.1 ccw(c67.535,35.259) 67.61,35.101 67.654,35.121 67.699,35.142 ; 67.699,35.142 67.745,35.163 67.835,35.206 67.926,35.248 67.971,35.269 68.017,35.29 68.062,35.311 68.107,35.332 68.153,35.353 68.244,35.396 68.334,35.438 ; 68.334,35.438 68.425,35.481 ; 68.425,35.481 68.516,35.523 ; 68.516,35.523 68.607,35.566 68.698,35.609 ; 68.698,35.609 68.789,35.652 68.88,35.695 68.971,35.738 69.063,35.782 69.2,35.847 69.338,35.913 69.476,35.979 ; 69.476,35.979 69.661,36.068 69.893,36.18 70.506,36.479 ; 70.506,36.479 70.987,36.716 71.231,36.838 71.428,36.936 71.628,37.037 71.779,37.113 71.931,37.189 72.084,37.267 ; 72.085,37.268 72.239,37.346 72.342,37.399 72.447,37.452 72.552,37.506 72.657,37.56 ; 72.657,37.56 72.763,37.615 72.87,37.67 72.978,37.725 73.086,37.781 73.195,37.838 73.304,37.895 73.414,37.952 ; 73.416,37.953 73.525,38.01 73.637,38.068 73.749,38.127 ; 73.75,38.127 73.863,38.187 73.977,38.247 74.091,38.307 74.207,38.368 74.323,38.43 ; 74.324,38.43 74.441,38.492 74.559,38.554 74.678,38.618 ; 74.678,38.618 74.797,38.681 74.918,38.746 75.04,38.811 ; 75.04,38.811 75.162,38.876 75.286,38.942 75.41,39.009 ; 75.411,39.01 75.535,39.077 ; 75.536,39.077 75.662,39.145 75.789,39.213 ccw(c75.706,39.367) 75.83,39.244 75.893,39.307 ccw(c75.77,39.431) 75.923,39.346 ccw(c75.77,39.431) 75.945,39.431 75.945,39.923 75.025,40.843 74.193,40.843 73.736,41.3 73.736,44.653 v1(74.143,45.06) 74.143,45.872 75.184,46.914 82.256,46.914 83.319,47.977 83.319,48.991 83.265,49.045 83.265,50.407 83.37,50.512 83.64,50.512 J2.20@83.68,50.552
  other v1: 3.532,31.949
MIC_CLK: J1.14 J2.17 | length 17.2
  Top Layer w0.1: v1(74.981,43.79) 74.992,43.801 75.699,43.801 J1.14@75.711,43.812 ; v1(77.978,43.821) 77.978,43.84 79.883,45.745 84.506,45.745 85.399,46.639 85.399,47.535 85.399,48.268 85.604,48.472 v1(85.604,49.784)
  Bottom Layer w0.1: v1(74.981,43.79) 75.006,43.815 77.972,43.815 v1(77.978,43.821) ; J2.17@84.76,50.902 84.8,50.862 85.058,50.862 85.136,50.784 85.446,50.474 85.446,50.018 85.604,49.86 v1(85.604,49.784)
MIC_DOUT: J1.18 J2.19 | length 17.5
  Top Layer w0.1: v1(74.836,44.54) 74.849,44.526 75.697,44.526 J1.18@75.711,44.512 ; v1(78.918,44.196) 79.858,45.136 v1(85.166,45.136)
  Bottom Layer w0.1: v1(74.836,44.54) 75.179,44.196 v1(78.918,44.196) ; J2.19@84.76,50.552 84.8,50.512 85.074,50.512 85.175,50.41 85.175,49.279 85.166,49.271 v1(85.166,45.136)
pads on no net: J1.11 J1.13 J1.15 J1.17 J1.19 J1.20 J1.21 J1.22 J1.23 J1.24 J2.2 J2.4 J2.6 J2.11 J2.12 J2.14 J2.16 J2.18 J2.21 J2.22 J2.23 J2.24 J2.P2_1 J2.P2_2

## Polygon pours and split planes (outlines as drawn)
GND on Top Layer "NONET_L-01_P-001" (hatched 45Degree grid 0.508 track 0.203, remove dead copper, pour order 11): 73.704,44.875 73.633,46.127 85.268,46.253 85.293,46.279 85.42,46.152 85.42,40.665 73.665,40.665
1V8 on Top Layer "NONET_L-01_P-001" (solid, pour order 1): 77.61,41.475 76.926,40.614 75.463,40.615 75.463,41.481
GND on Top Layer "GND_L01_P010" (solid, pour order 10): 82.649,54.771 84.984,54.771 84.984,53.234 82.652,53.247
GND on Bottom Layer "NONET_L-01_P-001" (hatched 45Degree grid 0.508 track 0.203, remove dead copper, pour order 12): 72.268,47.17 72.294,47.145 85.349,47.145 85.349,39.878 72.268,39.878
GND on Bottom Layer "GND_L02_P009" (solid, pour order 9): 82.344,54.746 86.258,54.746 86.258,53.127 82.348,53.147
no net on Bottom Stiffener "NONET_L-01_P-001" (solid): 1.162,31.497 1.072,31.44 1.093,31.343 3.15,27.483 4.508,28.126 5.449,28.582 5.75,28.743 3.785,32.334 3.656,32.357 2.515,31.953
no net on Bottom Stiffener "NONET_L-01_P-001" (solid): 72.618,39.954 72.618,47.068 78.549,47.169 78.628,40.385
no net on Top Stiffener "NONET_L-01_P-001" (solid, pour order 13): 82.488,54.361 82.579,54.631 82.777,54.761 85.623,54.738 85.855,54.661 85.954,54.426 85.954,48.92 82.683,48.92 82.503,49.098

## Keep-outs
Keep-Out Layer:
  drawing of 5632 lines, arcs and shapes, not listed

## Silkscreen, mask and mechanical layers (free items; w line width, h text height)
Board Outline:
  drawing of 5647 lines, arcs and shapes, not listed
commenti:
  lines w0.013: 7.518,16.942 5.588,16.942 4.47,18.059 4.47,19.025 8.484,23.038 ; 15.037,14.783 18.542,11.278 21.565,11.278 ; 82.067,39.167 85.573,35.662 88.595,35.662
  text "MCU I/O 1 = INT_LS/INT_MAG" at 75.005,49.537 h0.2
  text "MCU I/O 2 = GPIO_LS/IMU_INT1" at 74.98,49.105 h0.2
  text "MCU I/O 3 = SYN/IMU_INT2" at 74.98,48.648 h0.2
  text "MCU I/O 4 = INT_PPG/LDR_LS" at 74.98,48.216 h0.2
  text "----------" at 82.52,39.901 h0.8 r90
  text "Qua si piega" at 84.808,36.866 h0.8
  text "-----" at 9.339,23.432 h0.8 r100
  text "Qua si piega" at 5.509,17.46 h0.8
  text "-----------------" at 12.696,14.612 h0.8 r40
  text "Qua si piega" at 18.921,12.405 h0.8
Bottom Stiffener:
  text "Bottom Stiffener 0.1 mm" at 70.843,43.33 h1
  text "Bottom Stiffener 0.1 mm" at 27.993,30.655 h1
Top Stiffener:
  text "Top Stiffener 0.1 mm" at 61.948,52.172 h1